# Altium PCB candlebtm.PcbDoc
Units mil, origin at the board's own origin, x right, y up, seen from the top; angles counter-clockwise.
Board outline 2362.2 x 2362.2 mil, 2 copper layers (Top Layer, Bottom Layer); 52 components, 37 nets, 229 pads, 112 vias.
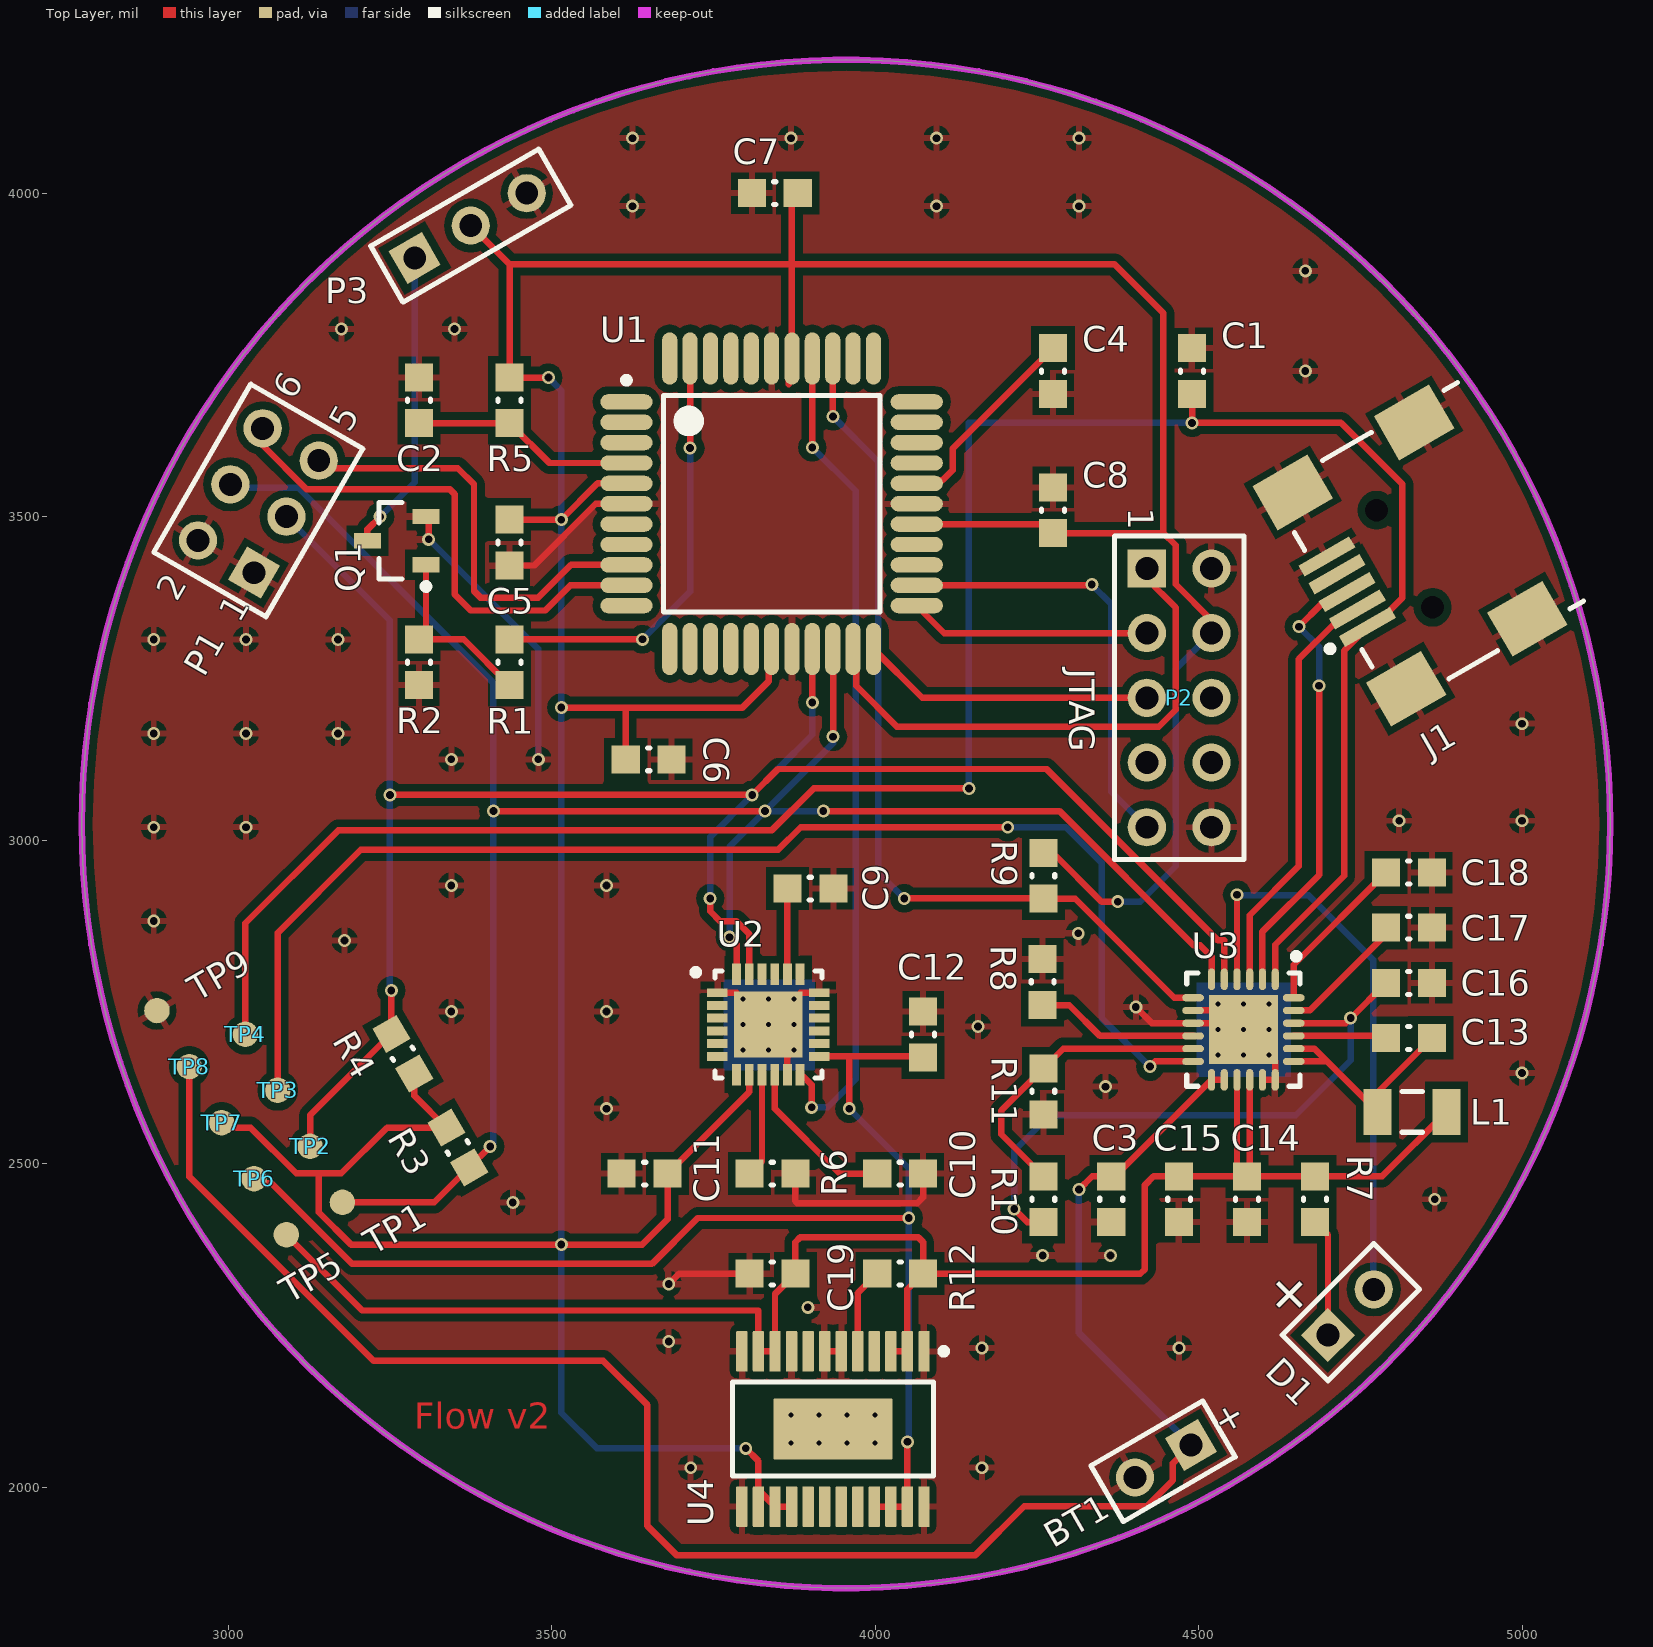
[diagram p0: Top Layer view]
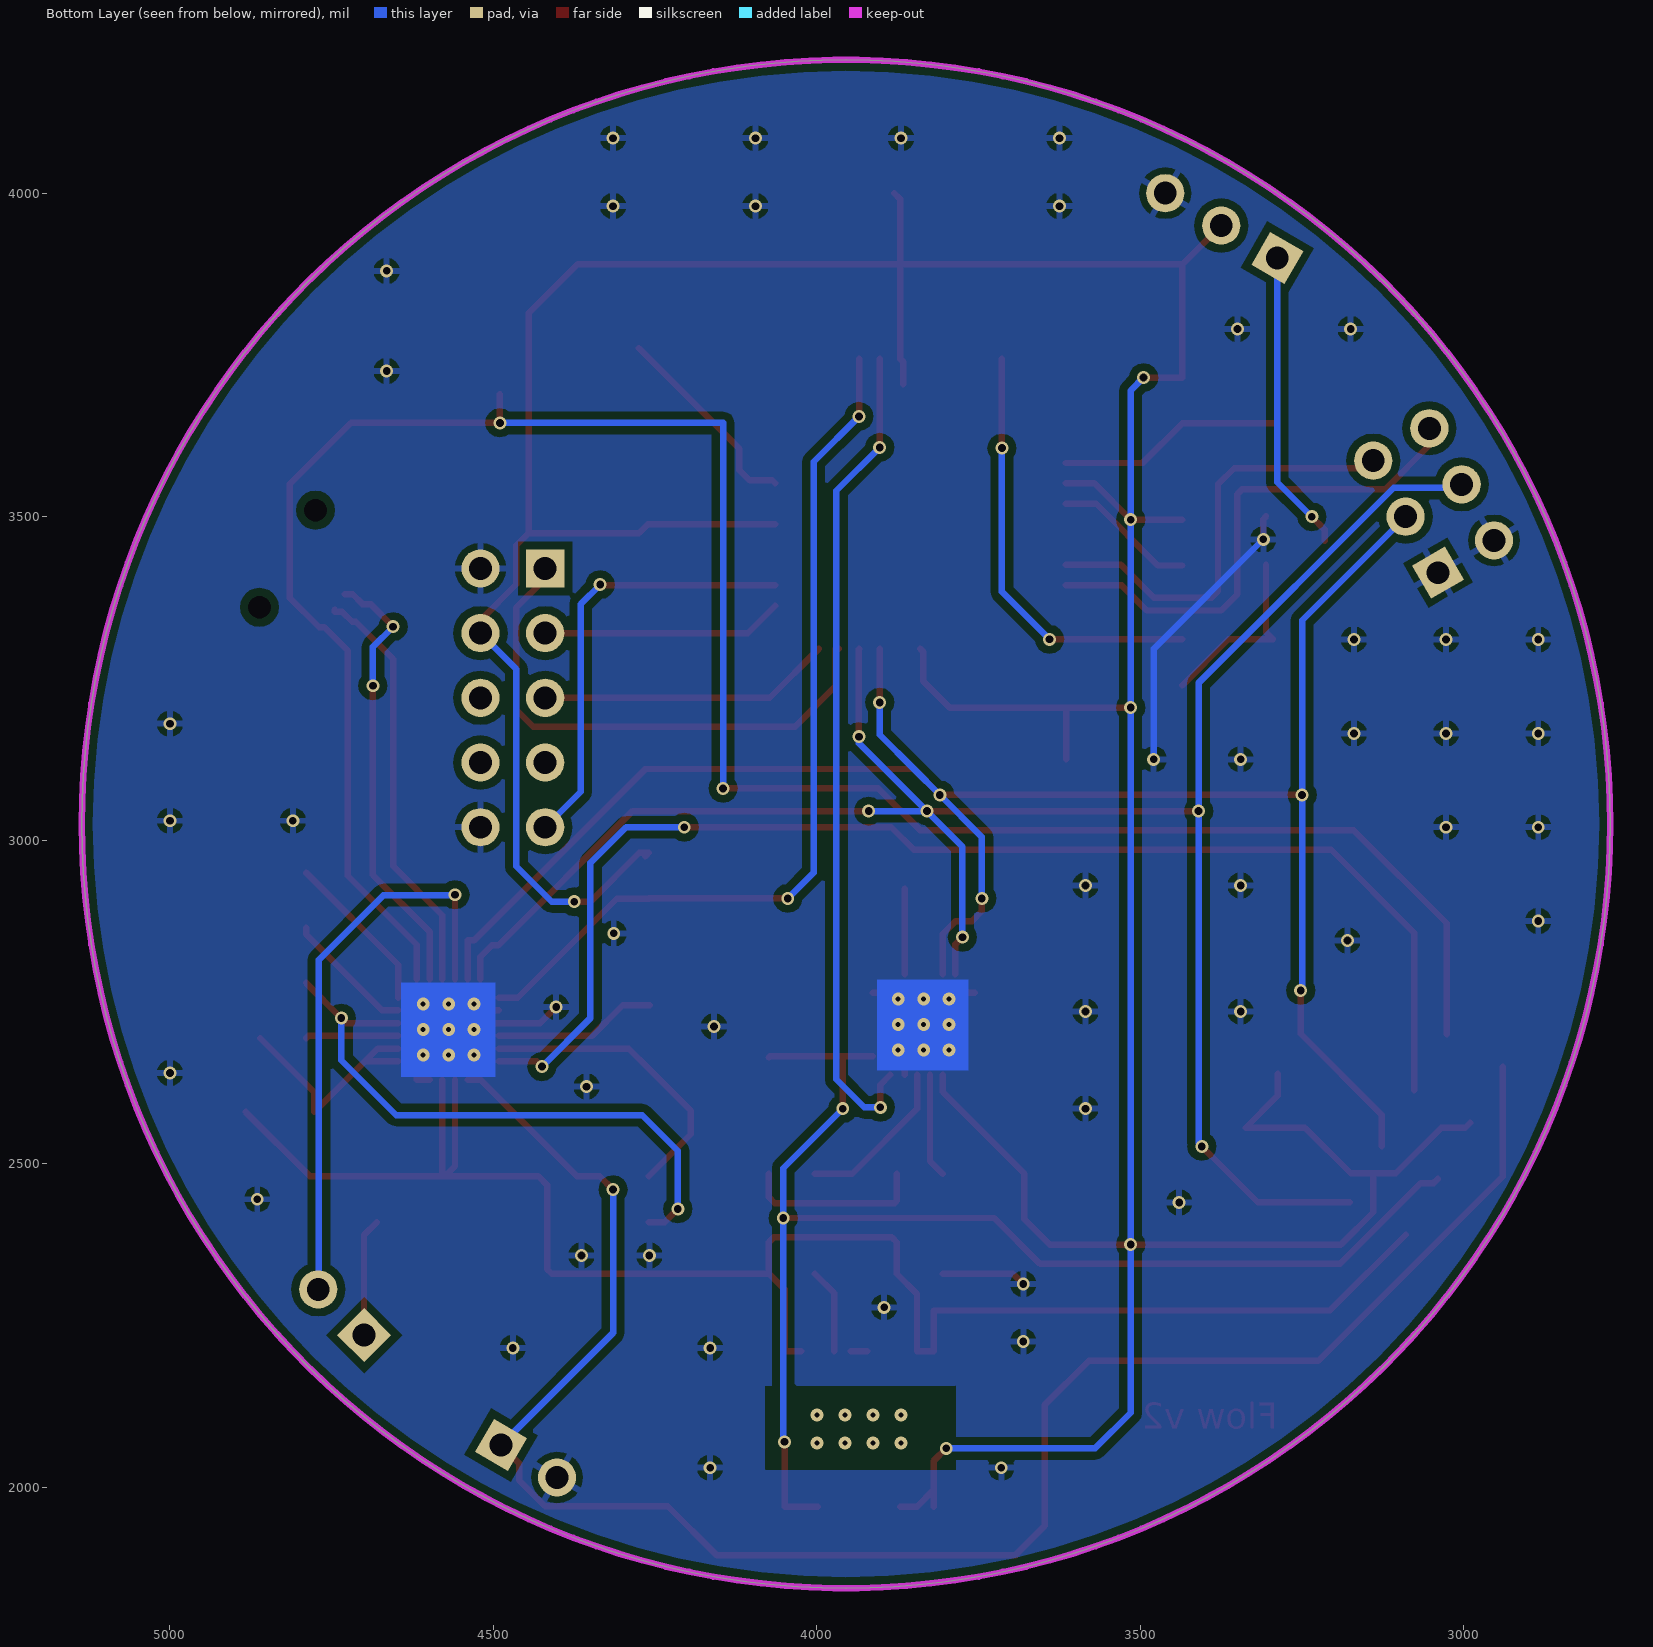
[diagram p1: Bottom Layer view, seen from below]

## Layer stack, top to bottom
Top Solder: solder mask 0.4, Solder Resist, Dk 3.5
Top Layer: signal copper 1.4
Dielectric 1: dielectric 12.6, FR-4, Dk 4.8
Bottom Layer: signal copper 1.4
Bottom Solder: solder mask 0.4, Solder Resist, Dk 3.5

## Board outline
2773.9,3025 ccw(c3955,3025) 3955,1843.9 ccw(c3955,3025) 5136.1,3025 ccw(c3955,3025) 3955,4206.1 ccw(c3955,3025)

## Design rules (kind name [scope] priority, off if disabled: settings)
Clearance [All] p1: gap=5
HoleToHoleClearance [All] p1 off: gap=10 allowstackedmicrovias=TRUE
MinimumSolderMaskSliver [All] p1 off: minsoldermaskwidth=10
PolygonConnect [All] p1: connectstyle=Relief reliefconductorwidth=10 reliefentries=4 polygonreliefangle="90 Angle" airgapwidth=10
RoutingVias [All] p1: holewidth=28 width=50 viastyle="Through Hole" minholewidth=28 minwidth=50 maxholewidth=28 maxwidth=50
SilkToSilkClearance [All] p1 off: silktosilkclearance=10
SilkToSolderMaskClearance [IsPad] p1 off: minsilkscreentomaskgap=10 clearancetoexposedcopper=TRUE
SolderMaskExpansion [All] p1: expansion=4
Width [All] p1: maxlimit=10 minlimit=10 preferedwidth=10
26 further rules are at their usual default settings.

## Classes and differential pairs
component class power: BT1 C1 C3 C13 C14 C15 C16 C17 C18 C19 D1 J1 L1 R7 R8 R9 R10 R11 R12 TP3 TP4 TP5 TP6 TP7 TP8 TP9 U3 U4
component class board: C2 C4 C5 C6 C7 C8 C9 C10 C11 C12 P1 P2 P3 Q1 R1 R2 R3 R4 R5 R6 TP1 TP2 U1 U2

## Components (designator, comment, footprint, x,y, rotation, side; value= is the part's Value field where it differs from the comment)
BT1 "Li-Polymer Bat" BAT-2 4445,2040 r210 top
C1 "1uF" CAPC0603(1608)100_M 4490,3725 r270 top
C2 "4.7nF" CAPC0603(1608)100_M 3295,3680 r270 top
C3 "10uF" CAPC0603(1608)100_M 4365,2445 r90 top
C4 "10nF" CAPC0603(1608)100_M 4275,3725 r90 top
C5 "100nF" CAPC0603(1608)100_M 3435,3460 r90 top
C6 "100nF" CAPC0603(1608)100_M 3650,3125 r180 top
C7 "100nF" CAPC0603(1608)100_M 3845,4000 r0 top
C8 "100nF" CAPC0603(1608)100_M 4275,3510 r270 top
C9 "2.2nF" CAPC0603(1608)100_M 3900,2925 r0 top
C10 "100nF" CAPC0603(1608)100_M 4038.74,2484.53 r0 top
C11 "10nF" CAPC0603(1608)100_M 3643.74,2484.53 r0 top
C12 "100nF" CAPC0603(1608)100_M 4074.17,2699.53 r270 top
C13 "47nF" CAPC0603(1608)100_M 4825,2693.99 r0 top
C14 "10uF" CAPC0603(1608)100_M 4575,2445 r90 top
C15 "10uF" CAPC0603(1608)100_M 4470,2445 r90 top
C16 "4.7uF" CAPC0603(1608)100_M 4825,2779.33 r0 top
C17 "8.2nF" CAPC0603(1608)100_M 4825,2864.66 r0 top
C18 "47nF" CAPC0603(1608)100_M 4825,2950 r0 top
C19 "1uF" CAPC0603(1608)100_M 3841.24,2330 r0 top
D1 "LED0" HDR1X2 4700,2235 r45 top
J1 "MINI USB" KYCN-KMBX-SMT-5S-S-30TR_V 4825.13,3438.93 r120 top
L1 "Inductor" INDC3216 4830,2580 r0 top
P1 "IO" HDR2X3 3040,3413.4 r60 top
P2 "JTAG" HDR2X5 4420,3420 r270 top
P3 "PWR" HDR1X3 3288.4,3900 r30 top
Q1 "BC848B" INF-SOT23_N 3260.55,3462.95 r180 top
R1 "10R" RESC0603(1608)_M 3435,3275 r90 top
R2 "10K" RESC0603(1608)_M 3295,3275 r90 top
R3 "10K" RESC0603(1608)_M 3355,2525 r120 top
R4 "10K" RESC0603(1608)_M 3270,2670 r300 top
R5 "100K 5%" RESC0603(1608)_M 3435,3680 r90 top
R6 "4K7" RESC0603(1608)_M 3841.24,2484.53 r180 top
R7 "2K2" RESC0603(1608)_M 4680,2445 r270 top
R8 "390R" RESC0603(1608)_M 4259,2781 r270 top
R9 "10K" RESC0603(1608)_M 4260,2945 r90 top
R10 "5K23" RESC0603(1608)_M 4260,2445 r270 top
R11 "10K" RESC0603(1608)_M 4260,2611.67 r90 top
R12 "4K7" RESC0603(1608)_M 4038.74,2330 r180 top
TP1 "TP-SDA" TP-SM-C-100 3176.6,2440.19 r30 top
TP2 "TP-SCL" TP-SM-C-100 3126.6,2526.79 r120 top
TP3 "TP-QON" TP-SM-C-100 3076.6,2613.4 r120 top
TP4 "TP-V5" TP-SM-C-100 3026.6,2700 r120 top
TP5 "TP-V3V7" TP-SM-C-100 3090,2390.19 r120 top
TP6 "TP-V3V3" TP-SM-C-100 3040,2476.79 r120 top
TP7 "TP-V1V8" TP-SM-C-100 2990,2563.4 r120 top
TP8 "TP-VBAT" TP-SM-C-100 2940,2650 r120 top
TP9 "TP-GND" TP-SM-C-100 2890,2736.6 r120 top
U1 "ATmega324PA-AU" 44A_M 3840,3520 r0 top
U2 "MPU6050" INSE-QFN-24_V 3835,2715 r0 top
U3 "BQ25890H" RGE24-2700X2700TP 4569.21,2707.24 r270 top
U4 "TPS70451" PWP0024A_M 3934.84,2089.92 r270 top

## Footprints (in the part's own frame and the unit in brackets; to place one, negate y for a bottom-side part, rotate by r counter-clockwise, add the part's x,y. Pads: shape width x height; smd on the part's side, far side on the other; paste and mask are expansions set on the pad)
44A_M [mm] "Thin QFP, 44-Leads, Body 10x10mm, Pitch 0.8mm, IPC Low Density"
  oval 2.05x0.6 smd: 1(-5.7,4) 2(-5.7,3.2) 3(-5.7,2.4) 4(-5.7,1.6) 5(-5.7,0.8) 6(-5.7,0) 7(-5.7,-0.8) 8(-5.7,-1.6) 9(-5.7,-2.4) 10(-5.7,-3.2) 11(-5.7,-4) 23(5.7,-4) 24(5.7,-3.2) 25(5.7,-2.4) 26(5.7,-1.6) 27(5.7,-0.8) 28(5.7,0) 29(5.7,0.8) 30(5.7,1.6) 31(5.7,2.4) 32(5.7,3.2) 33(5.7,4)
  oval 0.6x2.05 smd: 12(-4,-5.7) 13(-3.2,-5.7) 14(-2.4,-5.7) 15(-1.6,-5.7) 16(-0.8,-5.7) 17(0,-5.7) 18(0.8,-5.7) 19(1.6,-5.7) 20(2.4,-5.7) 21(3.2,-5.7) 22(4,-5.7) 34(4,5.7) 35(3.2,5.7) 36(2.4,5.7) 37(1.6,5.7) 38(0.8,5.7) 39(0,5.7) 40(-0.8,5.7) 41(-1.6,5.7) 42(-2.4,5.7) 43(-3.2,5.7) 44(-4,5.7)
  silkscreen extent -5.82,-4.25 4.25,4.97, body extent -5,-5 5,5, height 1.2
BAT-2 [mm] "Battery; 2 Leads"
  rect 1.5x1.5 hole 0.9: 1(-1.27,0)
  round 1.5 hole 0.9: 2(1.27,0)
  silkscreen extent -2.54,-1.27 2.54,1.27
CAPC0603(1608)100_M [mm] "Chip Capacitor, Body 1.6x0.8mm, Height 1.0mm, IPC Low Density"
  rect 1.1x1.1 smd: 1(-0.9,0) 2(0.9,0)
  silkscreen extent -0.05,-0.45 0.05,0.45, body extent -0.88,-0.48 0.88,0.48, height 1
HDR1X2 [mm] "Connector; Header; 2 Position"
  rect 1.5x1.5 hole 0.9: 1(0,0)
  round 1.5 hole 0.9: 2(2.54,0)
  silkscreen extent -1.27,-1.27 3.81,1.27
HDR1X3 [mm] "Connector; Header; 3 Position"
  rect 1.5x1.5 hole 0.9: 1(0,0)
  round 1.5 hole 0.9: 2(2.54,0) 3(5.08,0)
  silkscreen extent -1.27,-1.27 6.35,1.27
HDR2X3 [mm] "Connector; Header; 3x2 Position"
  rect 1.5x1.5 hole 0.9: 1(0,0)
  round 1.5 hole 0.9: 2(0,2.54) 3(2.54,0) 4(2.54,2.54) 5(5.08,0) 6(5.08,2.54)
  silkscreen extent -1.27,-1.27 6.35,3.81
HDR2X5 [mm] "Connector; Header; 5x2 Position"
  rect 1.5x1.5 hole 0.9: 1(0,0)
  round 1.5 hole 0.9: 2(0,2.54) 3(2.54,0) 4(2.54,2.54) 5(5.08,0) 6(5.08,2.54) 7(7.62,0) 8(7.62,2.54) 9(10.16,0) 10(10.16,2.54)
  silkscreen extent -1.27,-1.27 11.43,3.81
INDC3216 [mm] "Chip Inductor, Body 3.2x1.6mm, IPC High Density"
  rect 1.1x1.8 smd: 1(-1.35,0) 2(1.35,0)
  silkscreen extent -0.4,-0.8 0.4,0.8, body extent -1.7,-0.9 1.7,0.9, height 0.55
INF-SOT23_N [mm] "SOT23, 3-Leads, Body 2.9x1.3 mm, Pitch 0.95 mm, IPC Medium Density"
  rect 1.05x0.6 smd: 1(-1.15,0.95) 2(-1.15,-0.95) 3(1.15,0)
  silkscreen extent -1.28,-1.5 0.7,1.92, body extent -0.7,-1.5 0.7,1.5, height 1.1
INSE-QFN-24_V [mm] "QFN, 24-Leads, Body 4.00x4.00mm, Pitch 0.50mm, Thermal Pad 2.7x2.6mm"
  rect 0.8x0.35 smd: 1(-2,1.25) 2(-2,0.75) 3(-2,0.25) 4(-2,-0.25) 5(-2,-0.75) 6(-2,-1.25) 13(2,-1.25) 14(2,-0.75) 15(2,-0.25) 16(2,0.25) 17(2,0.75) 18(2,1.25)
  rect 0.35x0.85 smd: 7(-1.25,-1.975) 8(-0.75,-1.975) 9(-0.25,-1.975) 10(0.25,-1.975) 11(0.75,-1.975) 12(1.25,-1.975) 19(1.25,1.975) 20(0.75,1.975) 21(0.25,1.975) 22(-0.25,1.975) 23(-0.75,1.975) 24(-1.25,1.975)
  rect 2.7x2.6 smd: 25(0,0)
  silkscreen extent -2.97,-2.1 2.1,2.17, body extent -2,-2 2,2, height 0.95
KYCN-KMBX-SMT-5S-S-30TR_V [mm] "SMD, 5-Leads, Body 9.9x9.2mm, Pitch 0.8mm"
  rect 0.5x2.3 smd: 1(-1.6,2.8) 2(-0.8,2.8) 3(0,2.8) 4(0.8,2.8) 5(1.6,2.8)
  rect 2x2.5 smd: 6(-4.45,2.7) 7(4.45,2.7) 8(-4.45,-2.8) 9(4.45,-2.8)
  round 0.6 hole 0.9 unplated: MH1(-2.2,0.2) MH2(2.2,0.2)
  silkscreen extent -4.95,-5.05 4.95,4.63, body extent -4.95,-5.75 4.95,3.45, height 3.9
PWP0024A_M [mm] "SOP, 24-Leads, Body 4.54x7.9mm, Pitch 0.65mm, Thermal Pad 4.68x2.4mm, IPC Low Density"
  rrect22% 1.6x0.45 smd: 1(-3.05,3.575) 2(-3.05,2.925) 3(-3.05,2.275) 4(-3.05,1.625) 5(-3.05,0.975) 6(-3.05,0.325) 7(-3.05,-0.325) 8(-3.05,-0.975) 9(-3.05,-1.625) 10(-3.05,-2.275) 11(-3.05,-2.925) 12(-3.05,-3.575) 13(3.05,-3.575) 14(3.05,-2.925) 15(3.05,-2.275) 16(3.05,-1.625) 17(3.05,-0.975) 18(3.05,-0.325) 19(3.05,0.325) 20(3.05,0.975) 21(3.05,1.625) 22(3.05,2.275) 23(3.05,2.925) 24(3.05,3.575)
  rrect4% 2.4x4.68 smd: 25(0,0)
  silkscreen extent -3.17,-3.95 1.85,4.47, body extent -3.21,-3.9 3.21,3.9, height 0.98
RESC0603(1608)_M [mm] "Chip Resistor, Body 1.6x0.8mm, IPC Low Density"
  rect 1.1x1.1 smd: 1(-0.9,0) 2(0.9,0)
  silkscreen extent -0.05,-0.45 0.05,0.45, body extent -0.85,-0.47 0.85,0.47, height 0.6
RGE24-2700X2700TP [mm] "QFN, 24-Leads, Body 4x4mm, Pitch 0.5mm, Thermal Pad 2.7x2.7mm, TI Recommended"
  oval 0.85x0.28 smd paste-0.025 mask+0.07: 1(-1.975,1.25) 2(-1.975,0.75) 3(-1.975,0.25) 4(-1.975,-0.25) 5(-1.975,-0.75) 6(-1.975,-1.25) 13(1.975,-1.25) 14(1.975,-0.75) 15(1.975,-0.25) 16(1.975,0.25) 17(1.975,0.75) 18(1.975,1.25)
  oval 0.28x0.85 smd paste-0.025 mask+0.07: 7(-1.25,-1.975) 8(-0.75,-1.975) 9(-0.25,-1.975) 10(0.25,-1.975) 11(0.75,-1.975) 12(1.25,-1.975) 19(1.25,1.975) 20(0.75,1.975) 21(0.25,1.975) 22(-0.25,1.975) 23(-0.75,1.975) 24(-1.25,1.975)
  rect 2.7x2.7 smd paste-1.35 mask+0.07: 25(0,0)
  silkscreen extent -3,-2.22 2.22,2.22, body extent -2.07,-2.07 2.07,2.07, height 1
TP-SM-C-100 [mm] "Test Point, Surface Mounting, Circular, Pad Diameter 1mm"
  round 1 smd: 1(0,0)

## Part data
BT1: library part Battery, "Multicell Battery"
C1 C19: library part CMP-1034-02119-1, "CAP 1uF 16V ±10% 0402 (1005 Metric) Thickness 0.6mm SMD"
C2: library part CMP-1034-01811-1, "CAP 4.7nF 16V ±20% 0402 (1005 Metric) Thickness 0.6mm SMD"
C3 C14 C15: library part CMP-1036-04927-1, "CAP 10uF 16V ±10% 0805 (2012 Metric) Thickness 1.45mm SMD"
C4: library part CMP-1034-01883-1, "CAP 10nF 35V ±10% 0402 (1005 Metric) Thickness 0.6mm SMD"
C5 C6 C7 C8: library part CMP-1034-02068-1, "CAP 100nF 16V ±5% 0402 (1005 Metric) Thickness 0.6mm SMD"
C9: library part CMP-1034-01722-1, "CAP 2.2nF 6.3V ±5% 0402 (1005 Metric) Thickness 0.6mm SMD"
C10 C12: library part CMP-1034-02064-1, "CAP 100nF 10V ±5% 0402 (1005 Metric) Thickness 0.6mm SMD"
C11: library part CMP-1034-01880-1, "CAP 10nF 25V ±10% 0402 (1005 Metric) Thickness 0.6mm SMD"
C13 C18: library part CMP-1035-02503-1, "CAP 47nF 16V ±10% 0603 (1608 Metric) Thickness 1mm SMD"
C16: library part CMP-1034-02133-1, "CAP 4.7uF 4V ±10% 0402 (1005 Metric) Thickness 0.6mm SMD"
C17: library part CMP-1035-02285-1, "CAP 8.2nF 16V ±10% 0603 (1608 Metric) Thickness 1mm SMD"
D1: "Typical INFRARED GaAs LED"
J1: library part CMP-1673-00002-6, "Female Mini-USB, RA, -55 to 85 degC, 5-Pin SMD, RoHS, Tape and Reel"
P1: library part "Header 3X2", "Header, 3-Pin, Dual row"
P2: library part "Header 5X2", "Header, 5-Pin, Dual row"
P3: library part "Header 3", "Header, 3-Pin"
Q1: library part CMP-1177-00031-1, "NPN Silicon AF Transistor, 30 V VCEO, 100 mA IC, SOT23, Reel, Green"
R1: library part CMP-1011-00026-1, "10R 0.063W 5% 0402 (1005 Metric)  SMD"
R2: library part CMP-1011-00098-1, "10K 0.063W 5% 0402 (1005 Metric)  SMD"
R3 R4 R9 R11: library part CMP-1011-00098-1
R5: library part CMP-1011-00122-1, "100K 0.063W 5% 0402 (1005 Metric)  SMD"
R6 R12: library part CMP-1011-00090-1, "4K7 0.063W 5% 0402 (1005 Metric)  SMD"
R7: library part CMP-1012-00082-1, "2K2 0.1W 5% 0603 (1608 Metric)  SMD"
R8: library part CMP-1012-00064-1, "390R 0.1W 5% 0603 (1608 Metric)  SMD"
R10: library part CMP-1012-00592-1, "5K23 0.1W 1% 0603 (1608 Metric)  SMD"
TP1 TP2 TP3 TP4 TP5 TP6 TP7 TP8 TP9: library part CMP-0484-00002-2, "Test Point, Surface Mount, Circular, Pad Diameter 1 mm"
U1: library part CMP-0095-00308-2, "8-bit AVR Microcontroller, 32KB Flash, 1KB EEPROM, 2KB SRAM, 44-pin TQFP, Industrial Grade (-40°C to 85°C)"
U2: library part CMP-1753-00002-1, "3-Axis Gyroscope, 3-Axis Accelerometer / , 2.375 to 3.46 V, -40 to 105 degC, 24-Pin QFN, RoHS, Tape and Reel"
U3: "I2C Controlled 5A Single Cell with NVDC Power Path Management"
U4: library part TPS704, "DUAL-OUTPUT, LOW DROPOUT VOLTAGE REGULATORS WITH INTEGRATED SVS FOR SPLIT VOLTAGE SYSTEMS"

## Via types
v1: diameter 20, hole 12, Top Layer to Bottom Layer, 86 vias
v2: diameter 19.68, hole 7.87, Top Layer to Bottom Layer, 26 vias

## Nets (pads, with @x,y where several pads share a name; then routed paths per layer and width w, separated by ;. In a path a pad name is that pad's centre, name@x,y a point inside that pad or via, vN(x,y) a via of type N, cw(c..) or ccw(c..) an arc to the next point about the centre after c; other vN are vias at no path point)
BATINT: R9.1 U1.36 U3.7 | length 1390.2
  Top Layer w10: U1.36 3934.49,3655.51 v1(3935,3655) ; v1(4045,2910) 4259.57,2910 R9.1 4309.43,2909.57 4462.54,2756.46 U3.7
  Bottom Layer w10: v1(3935,3655) 4005,3585 4005,2950 v1(4045,2910)
D+: J1.3 U3.2 | length 689.6
  Top Layer w10: U3.2 4598.74,2858.74 4686.28,2946.28 v1(4686.28,3238.72) ; v1(4655,3330) 4689.92,3364.92 4702.41,3364.92 4717.54,3380.06 J1.3@4729.66,3380.06
  Bottom Layer w10: v1(4655,3330) 4686.28,3298.72 v1(4686.28,3238.72)
D-: J1.2 U3.3 | length 650.8
  Top Layer w10: U3.3 4579.06,2884.06 4655,2960 4655,3280 4712.65,3337.65 4718.32,3337.65 4733.45,3352.78 4745.41,3352.78 J1.2
GND: BT1.2 C1.1 C2.1 C3.1 C4.1 C5.1 C6.1 C7.1 C8.1 C9.2 C10.2 C11.1 C12.1 C14.1 C15.1 C16.2 C17.2 C18.2 C19.1 J1.5 J1.6 J1.7 J1.8 J1.9 P1.1 P1.2 P2.2 P2.10 P3.3 Q1.2 R2.1 R6.1 R8.1 R11.1 TP9.1 U1.6 U1.18 U1.28 U1.39 U2.1 U2.11 U2.18 U2.25 U3.8 U3.9 U3.17 U3.18 U3.25 U4.1 U4.6 U4.7 U4.9 U4.12 U4.13 U4.24 | length 1480.8
  Top Layer w10: Q1.2 3310,3496.18 v1(3310,3465) ; C5.1 3472.97,3424.57 3568.41,3520 U1.6 ; v1(3681,2314) 3697,2330 C19.1 ; U2.1 3785.79,2764.21 v2(3795.63,2754.37) ; U2.11 3864.53,2665.79 v2(3874.37,2675.63) ; v2(3874.37,2754.37) 3884.21,2764.21 U2.18 ; R6.1 3876.67,2442.33 3880,2439 4065,2439 4074.17,2448.17 C10.2 ; U4.7 U4.6 ; v1(4403,2742) 4427.91,2717.09 U3.9 4520,2717.09 v2(4529.84,2707.24) ; U3.8 4520,2736.77 v2(4529.84,2746.61) ; U3.17 U3.18 4618.43,2658.03 v2(4608.58,2667.87)
  Bottom Layer w10: v1(3310,3465) 3479.42,3295.58 v1(3479.42,3125)
  other v1: 3715,2030 4165,2030 4165,2215 4470,2215 3681,2225 3896,2278 4259,2358 4364,2358 3440,2440 4865,2445 3585,2585 4356,2619 5000,2640 4159,2712 3345,2735 3585,2735 3180,2845 4314,2856 2885,2875 3345,2930 3585,2930 2885,3020 3027.5,3020 4810,3030 5000,3030 3345,3125 2885,3165 3027.5,3165 3170,3165 5000,3180 2885,3310 3027.5,3310 3170,3310 4665,3725 3175,3790 3350,3790 4665,3880 3625,3980 4095,3980 4315,3980 3625,4085 3870,4085 4095,4085 4315,4085
  other v2: 4529.84,2667.87 4569.21,2667.87 3795.63,2675.63 3835,2675.63 4569.21,2707.24 4608.58,2707.24 3795.63,2715 3835,2715 3874.37,2715 4569.21,2746.61 4608.58,2746.61 3835,2754.37
LNEG: P3.1 Q1.3 | length 467.3
  Top Layer w10: Q1.3 3215.28,3480.28 v1(3235,3500)
  Bottom Layer w10: v1(3235,3500) 3288.4,3553.4 P3.1
MPUINT: U1.37 U2.12 | length 1284.5
  Top Layer w10: U2.12@3886.42,2637.24 3902.01,2621.65 v1(3902.01,2587.01) ; v1(3902.99,3607.01) U1.37
  Bottom Layer w10: v1(3902.01,2587.01) 3926.65,2587.01 3970,2630.36 3970,3540 v1(3902.99,3607.01)
NetC2_2: C2.2 R5.1 U1.4 | length 346.1
  Top Layer w10: C2.2 R5.1 3496.57,3582.99 U1.4
NetC4_2: C4.2 U1.29 | length 316.6
  Top Layer w10: U1.29 4069.09,3556.18 4104.06,3556.18 4119.76,3571.89 4119.76,3605.2 C4.2
NetC9_1: C9.1 U2.20 | length 132.3
  Top Layer w10: U2.20 3864.53,2924.96 C9.1
NetC10_1: C10.1 U2.10 | length 252.2
  Top Layer w10: U2.10 3844.84,2585.16 3945.47,2484.53 C10.1
NetC13_1: C13.1 U3.21 | length 144
  Top Layer w10: U3.21 4786.15,2697.4 C13.1
NetC13_2: C13.2 L1.1 U3.19 U3.20 | length 370.8
  Top Layer w10: U3.19 4698.82,2658.03 ; U3.20 4679.13,2677.72 4698.82,2658.03 ; C13.2 4776.85,2610.41 L1.1 4698.82,2658.03
NetC17_1: C17.1 U3.23 | length 201.5
  Top Layer w10: U3.23 4671.77,2736.77 4789.57,2854.57 C17.1
NetC18_1: C18.1 U3.24 | length 252.6
  Top Layer w10: U3.24 4646.97,2807.4 C18.1
NetD1_1: D1.1 R7.2 | length 182.9
  Top Layer w10: R7.2 4700,2389.57 D1.1
NetD1_2: D1.2 U3.4 | length 881.9
  Top Layer w10: U3.4 v1(4559.37,2915.63)
  Bottom Layer w10: 4570,2915 4670,2915 4769.64,2815.36 D1.2@4769.64,2305
NetQ1_1: Q1.1 R1.1 R2.2 | length 289
  Top Layer w10: Q1.1 3305.83,3321.26 R2.2 3364.13,3310.43 R1.1
NetR1_2: R1.2 U1.43 | length 669.9
  Top Layer w10: R1.2 v1(3640.43,3310.43) ; v1(3714.02,3605.98) U1.43
  Bottom Layer w10: v1(3640.43,3310.43) 3714.02,3384.02 v1(3714.02,3605.98)
NetR6_2: R6.2 U2.9 | length 160.7
  Top Layer w10: R6.2 3825.16,2503.88 U2.9
NetR8_2: R8.2 U3.10 | length 252.9
  Top Layer w10: R8.2@4258.17,2744.73 4300.27,2744.73 4347.6,2697.4 U3.10
NetR10_1: R10.1 R11.2 U3.11 | length 464.7
  Top Layer w10: R10.1 4195,2545.43 4195,2582.1 R11.2 4290.62,2677.72 U3.11
NetR12_2: R12.2 U4.5 | length 132.5
  Top Layer w10: U4.5 3973.23,2299.92 R12.2
NetTP3_1: TP3.1 U3.12 | length 2022.9
  Top Layer w10: TP3.1 3076.6,2856.6 3205,2985 3850,2985 3885,3020 v1(4205,3020) ; v1(4425,2650) 4433.03,2658.03 U3.12
  Bottom Layer w10: v1(4205,3020) 4295,3020 4350,2965 4350,2725 v1(4425,2650)
REGN: C16.1 R10.2 U3.22 | length 943.8
  Top Layer w10: v1(4215,2430) 4235.43,2409.57 R10.2 ; U3.22 4727.33,2717.09 ; v1@4735.12,2724.88 C16.1
  Bottom Layer w10: v1(4215,2430) 4215,2520 4270,2575 4650,2575 4735,2660 v1(4735,2725)
RXD: P1.5 U1.9 | length 680.8
  Top Layer w10: P1.5 3151.6,3575 3355,3575 3380,3550 3380,3385 3390,3375 3479.49,3375 3530,3425.51 U1.9
SCL: P1.3 R4.1 TP2.1 U1.19 U2.23 U3.5 | length 3182.3
  Top Layer w10: P1.3 P1.3@3095.34,3500 ; TP2.1 3126.6,2575.01 R4.1 v1(3252.28,2767.72) ; v1(3250,3070) v1(3810,3070) 3850,3110 4265,3110 4530,2845 4539.68,2845 U3.5 ; v1(3745,2910) 3745,2890 3760,2875 3785.36,2875 3805.79,2854.57 3805.47,2854.25 U2.23 ; v1(3902.99,3212.99) U1.19
  Bottom Layer w10: P1.3 3250,3340 v1(3250,3070) 3250,2770 v1(3252.28,2767.72) ; v1(3745,2910) 3745,3005 v1(3810,3070) 3850,3110 3902.99,3162.99 v1(3902.99,3212.99)
SDA: P1.4 R3.1 TP1.1 U1.20 U2.24 U3.6 | length 3328.4
  Top Layer w10: TP1.1 3318.59,2440.19 R3.1 v1(3405,2526.6) ; v1(3410,3045) v1(3830,3045) ; v1(3775,2850) 3785.79,2839.21 U2.24 ; v1(3920,3045) 4285,3045 4492.68,2837.32 4502.68,2837.32 4520,2820 U3.6 ; U1.20 3935,3295.08 v1(3935,3160)
  Bottom Layer w10: P1.4 3008.87,3544.53 3108.44,3544.53 3410,3242.97 v1(3410,3045) 3410,2531.6 v1(3405,2526.6) ; v1(3775,2850) 3775,2990 v1(3830,3045) ; v1(3920,3045) v1(3830,3045) ; v1(3935,3160) 3935,3150 v1(3830,3045)
TCK: P2.1 U1.21 | length 829.4
  Top Layer w10: U1.21 3970.67,3295.59 3970.67,3238.59 4033.78,3175.47 4438.44,3175.47 4464.53,3201.56 4464.53,3359.53 4420,3404.06 P2.1
TDI: P2.9 U1.24 | length 681.2
  Top Layer w10: U1.24 4334.02,3394.02 v1(4335,3395)
  Bottom Layer w10: v1(4335,3395) 4365,3365 4365,3075 P2.9
TDO: P2.3 U1.23 | length 373.2
  Top Layer w10: U1.23 4106.93,3320 P2.3
TMS: P2.5 U1.22 | length 453.8
  Top Layer w10: U1.22 4073.07,3220 P2.5
TXD: P1.6 U1.10 | length 801.2
  Top Layer w10: P1.6 3053.4,3610.23 3121.56,3542.07 3342.93,3542.07 3350,3535 3350,3380 3375,3355 3490,3355 3529.02,3394.02 U1.10
V1V8: C5.2 C6.2 C7.2 C8.2 C11.2 P2.4 P3.2 R3.2 R4.2 R5.2 R9.2 TP7.1 U1.5 U1.17 U1.27 U1.38 U2.8 U4.14 U4.15 U4.16 | length 7399
  Top Layer w10: TP7.1 2997.71,2555.69 3034.67,2555.69 3105.36,2485 3140.18,2485 ; R4.2 3287.72,2605.25 R3.2 3245.69,2555.69 3175,2485 3140.18,2485 ; P3.2 3435,3890 ; C5.2 v1(3515,3495.43) 3571.06,3551.5 U1.5 ; v1(3495,3715) 3435.43,3715 R5.2 3435,3890 ; v1(3515,3205) 3615,3205 ; C6.2 3614.57,3204.57 3615,3205 ; v1(3800,2060) 3819.69,2040.31 U4.14@3819.69,1995.43 ; U2.8 3805.47,2610.83 C11.2 3679.17,2414.17 3640,2375 v1(3515,2375) 3190,2375 3140.18,2424.82 3140.18,2485 ; U4.14 U4.14@3819.69,1995.43 ; U1.17 3835.32,3290.91 3835.32,3245.32 3795,3205 3615,3205 ; 3866.81,3704.76 3866.81,3739.72 U1.38 3871.5,3890 ; 3870,3890 4370,3890 4445.7,3814.3 4445.7,3474.57 ; U4.16 U4.15 U4.14@3819.69,1995.43 ; C7.2 3871.5,3991.06 3871.5,3890 ; U1.27 4261.06,3488.5 C8.2 4445.7,3474.57 ; R9.2@4264.96,2975.47 R9.2 4274.57,2980.43 4350,2905 v1(4375,2905) ; P2.4 4520,3340 4464.53,3395.47 4464.53,3455.74 4445.7,3474.57 ; 3435,3890 3871.5,3890
  Bottom Layer w10: v1(3495,3715) 3515,3695 v1(3515,3495.43) v1(3515,3205) 3515,2115 3570,2060 v1(3800,2060) ; v1(4375,2905) 4410,2905 4464.53,2959.53 4464.53,3264.53 P2.4
V3V3: C12.2 TP6.1 U2.13 U4.21 U4.22 U4.23 | length 2043.2
  Top Layer w10: TP6.1 3046.79,2470 3066.72,2470 3191.72,2345 3655,2345 3726,2416 v1(4052,2416) ; U2.13 3960,2665.79 ; v1(3960,2585) 3960,2665.79 ; U4.21 U4.22 U4.23 v1(4050,2070) ; C12.2 4072.48,2665.79 3960,2665.79
  Bottom Layer w10: v1(3960,2585) 4052,2493 v1(4052,2416) 4052,2072 v1(4050,2070)
V3V7: C14.2 C15.2 C19.2 L1.2 R7.1 R12.1 TP5.1 U3.15 U3.16 U4.2 U4.3 U4.10 U4.11 | length 2751.4
  Top Layer w10: TP5.1 3207.18,2273.01 3819.69,2273.01 U4.11 U4.10 3845.28,2298.6 C19.2 3876.67,2378.67 3884,2386 4067,2386 4074.17,2378.83 R12.1 ; U4.3 U4.2 4050,2305.83 R12.1 ; U3.15 4559.37,2496.06 C14.2 ; U3.16 4579.06,2484.49 C14.2 ; L1.2 4783.58,2480.43 C14.2 ; R12.1 4410,2330 4417,2337 4417,2467 4430.43,2480.43 C15.2 C14.2
V5V: C1.2 J1.1 TP4.1 U3.1 | length 3546.5
  Top Layer w10: TP4.1 3026.6,2871.6 3170,3015 3840,3015 3905,3080 v1(4145,3080) ; C1.2 v1(4490,3645) 4720,3645 4815,3550 4815,3374.89 4769.36,3329.26 J1.1 4725,3293.1 4725,2945 4618.43,2838.43 U3.1
  Bottom Layer w10: v1(4145,3080) 4145,3645 v1(4490,3645)
VBAT: BT1.1 C3.2 TP8.1 U3.13 U3.14 | length 2917.7
  Top Layer w10: TP8.1 2940,2480 3225,2195 3580,2195 3648.02,2126.98 3648.02,1940 3693.02,1895 4155,1895 4230.47,1970.47 4420.14,1970.47 4460,2010.33 4460,2036.7 BT1.1 ; v1(4315,2460) 4335.43,2480.43 C3.2 4370.95,2480.43 U3.13 U3.14
  Bottom Layer w10: v1(4315,2460) 4315,2238.3 BT1.1
pads on no net: J1.4 J1.MH1 J1.MH2 P2.6 P2.7 P2.8 U1.1 U1.2 U1.3 U1.7 U1.8 U1.11 U1.12 U1.13 U1.14 U1.15 U1.16 U1.25 U1.26 U1.30 U1.31 U1.32 U1.33 U1.34 U1.35 U1.40 U1.41 U1.42 U1.44 U2.2 U2.3 U2.4 U2.5 U2.6 U2.7 U2.14 U2.15 U2.16 U2.17 U2.19 U2.21 U2.22 U4.4 U4.8 U4.17 U4.18 U4.19 U4.20 U4.25
copper on no net:
  other v2: 3869.88,2068.27 3913.19,2068.27 3956.5,2068.27 3999.8,2068.27 3869.88,2111.57 3913.19,2111.58 3956.5,2111.57 3999.8,2111.57

## Polygon pours and split planes (outlines as drawn)
GND on Top Layer "Bottom Layer-No Net" (solid, remove dead copper, pour order 2): 2540,4270 2540,4151 2575,1865 3460,1865 3675,1650 3690,1665 5195,1665 5195,2140 6015,2960 5665,3310 5665,4285
GND on Bottom Layer "Bottom Layer-No Net" (solid, remove dead copper, pour order 4): 2500,4230 2500,1745 2625,1620 2650,1645 5525,1645 5525,4270 5575,4320

## Keep-outs
Keep-Out Layer:
  circle w10: c3955,3025 r1181.1

## Other copper
Top Layer:
  pour cut-out: 3783,2160 3783,2023 3785,2021 4088,2021 4088,2160
  text "Flow v2" at 3288,2090 h40
Bottom Layer:
  rectangle net GND: 4497,2634 4643,2780
  rectangle net GND: 3766,2644 3907,2785
  pour cut-out: 3785,2157 3785,2027 4079,2027 4080,2028 4080,2156

## Silkscreen, mask and mechanical layers (free items; w line width, h text height)
Top Overlay:
  text "+" at 4635,2255 h60 r45

## Text inside footprints (layer, text, board x,y; h text height)
BT1: Top Overlay "+" at 4558.77,2131.92 h39.37 r210
J1: Mechanical 1 "PCB EDGE" at 4867.05,3740.26 h39.37 r120
P1: Top Overlay "6" at 3100.72,3678.56 h39.37 r60; Top Overlay "5" at 3187.32,3628.56 h39.37 r60; Top Overlay "2" at 2920.72,3366.79 h39.37 r60; Top Overlay "1" at 3017.32,3334.12 h39.37 r60
P2: Top Overlay "1" at 4391,3514 h39.37 r270